# Altium PCB Copy of SoM.PcbDoc (part 4 of 8)
Units mm, origin at the board's own origin, x right, y up, seen from the top; angles counter-clockwise.
Board outline 69.6 x 50 mm, 10 copper layers ([1] Signal HS-H, [2] GND, [3] Signal HS-V, [4] Signal H, [5] GND, [6] POWER, [7] Signal V, [8] Signal HS-H, [9] GND, [10] Signal HS-V), stack 1.146 mm thick; 537 components, 516 nets, 5689 pads, 981 vias.
Unrouted connection lines stored in the file: 963.
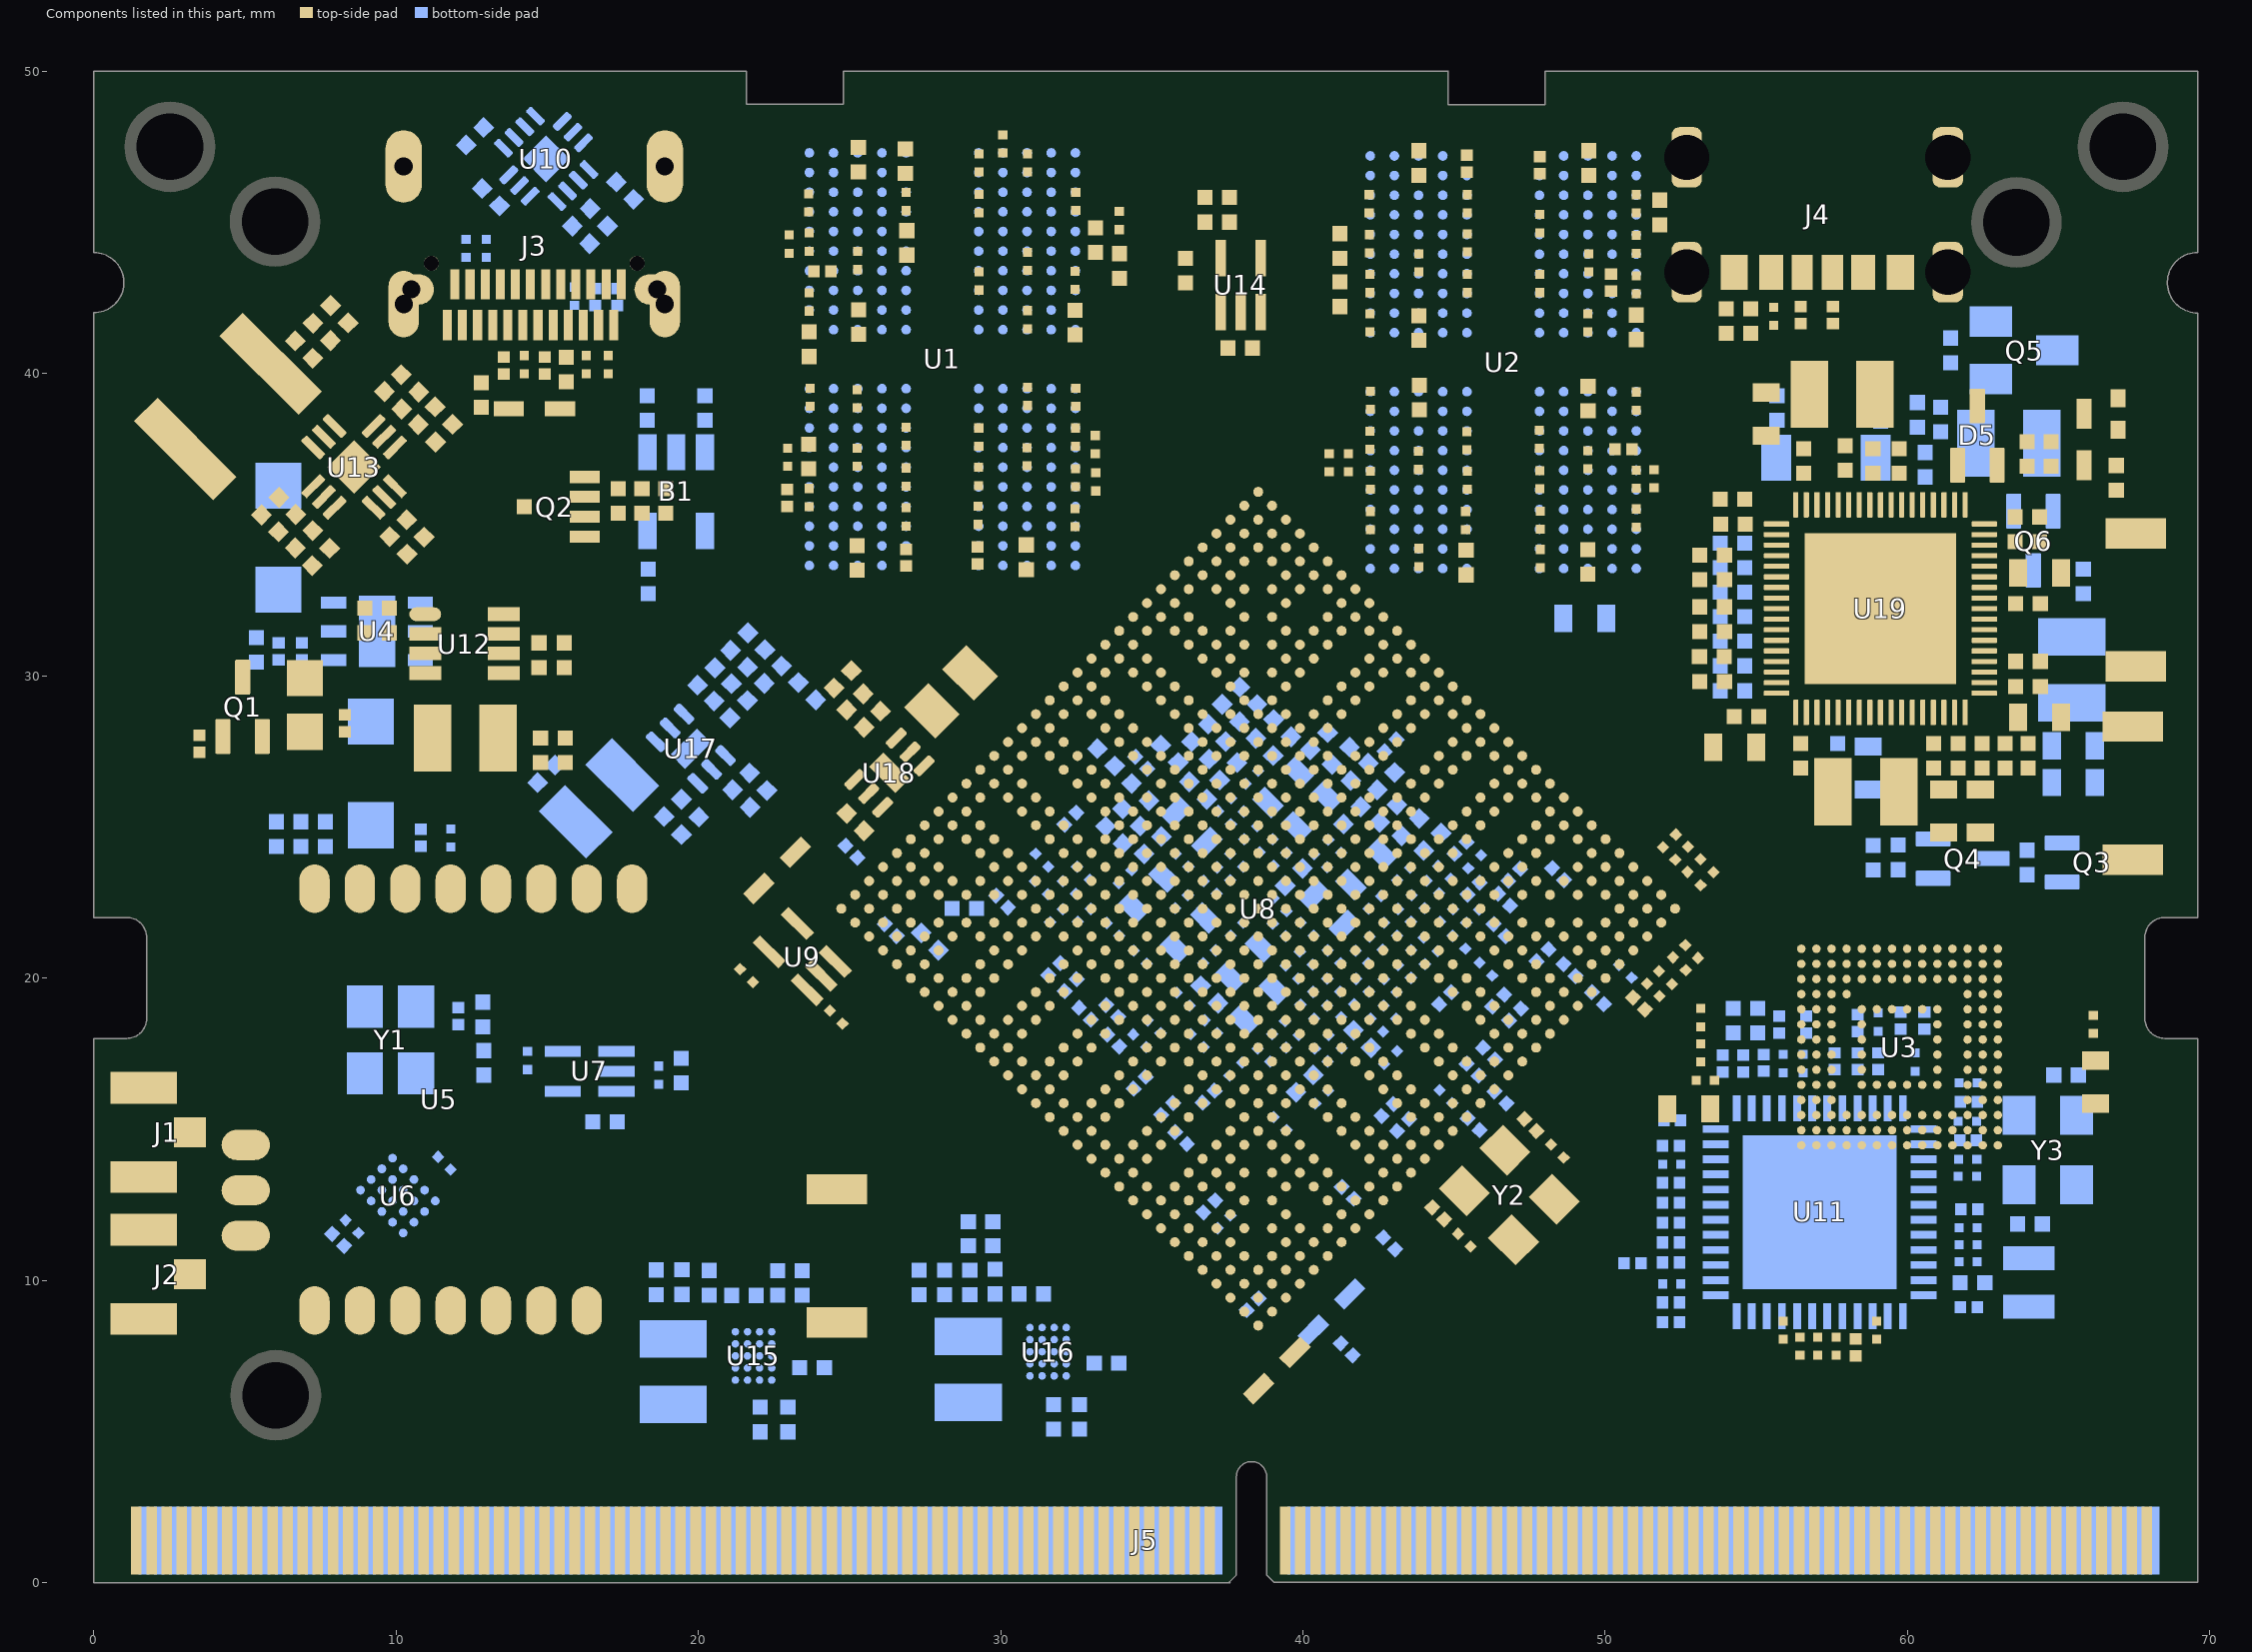
[diagram p9: the components of this part, seen from the top]

## Free pads (board coordinates)
  round 0.013 on Mech8: 1(0.001,0.004) 1(0.001,0.004) 1(0.001,0.034) 1(0.001,0.034) 1(0.001,0.604) 1(0.001,0.604) 1(0.001,42.016) 1(0.001,42.016) 1(0.001,44) 1(0.001,44) 1(0.001,49.004) 1(0.001,49.004) 1(0.001,49.014) 1(0.001,49.014) 1(0.001,49.984) 1(0.001,49.984) 1(0.001,50.004) 1(0.001,50.004) 1(0.001,49.014) 1(0.001,49.014) 1(0.008,44) 1(0.008,44) 1(0.021,50.004) 1(0.021,50.004) 1(0.031,0.004) 1(0.031,0.004) 1(0.601,0.004) 1(0.601,0.004) 1(1.001,50.004) 1(1.001,50.004) 1(21.596,50.004) 1(21.596,50.004) 1(24.799,50.004) 1(24.799,50.004) 1(37.551,0.004) 1(37.551,0.004) 1(37.801,0.254) 1(37.801,0.254) 1(37.801,3.504) 1(37.801,3.504) 1(38.301,4.004) 1(38.301,4.004) 1(38.801,0.254) 1(38.801,0.254) 1(38.801,3.504) 1(38.801,3.504) 1(39.051,0.004) 1(39.051,0.004) 1(44.799,50.004) 1(44.799,50.004) 1(44.801,50.002) 1(44.801,50.002) 1(48.004,50.004) 1(48.004,50.004) 1(67.851,18.654) 1(67.851,18.654) 1(67.851,21.354) 1(67.851,21.354) 1(68.501,18.004) 1(68.501,18.004) 1(68.501,22.004) 1(68.501,22.004) 1(69.001,0.004) 1(69.001,0.004) 1(69.589,44.002) 1(69.589,44.002) 1(69.601,0.604) 1(69.601,0.604) 1(69.601,18.004) 1(69.601,18.004) 1(69.601,22.004) 1(69.601,22.004) 1(69.601,42.006) 1(69.601,42.006) 1(69.601,44.002) 1(69.601,44.002) 1(69.601,49.004) 1(69.601,49.004) 1(69.601,50.004) 1(69.601,50.004)
  round 0.013 on Mech1: 1(0.001,18.004) 1(0.001,18.004) 1(0.001,22.004) 1(0.001,22.004) 1(0.001,45.404) 1(0.001,45.404) 1(1.101,18.004) 1(1.101,18.004) 1(1.101,22.004) 1(1.101,22.004) 1(1.751,18.654) 1(1.751,18.654) 1(1.751,21.354) 1(1.751,21.354) 1(21.596,48.902) 1(21.596,48.902) 1(24.799,48.902) 1(24.799,48.902) 1(44.801,48.894) 1(44.801,48.894) 1(48.004,48.894) 1(48.004,48.894) 1(68.601,50.004) 1(68.601,50.004) 1(69.561,0.004) 1(69.561,0.004) 1(69.601,0.004) 1(69.601,0.004) 1(69.601,0.044) 1(69.601,0.044) 1(69.601,45.404) 1(69.601,45.404)
  round 0.013 on Mech4: 1(0.486,47.504) 1(1.101,6.004) 1(1.448,9.148) 1(1.498,0.304) 1(1.498,0.304) 1(1.498,2.564) 1(1.498,2.564) 1(1.853,0.304) 1(1.853,0.304) 1(1.853,2.564) 1(1.853,2.564) 1(1.998,0.304) 1(1.998,0.304) 1(1.998,2.564) 1(1.998,2.564) 1(2.353,0.304) 1(2.353,0.304) 1(2.353,2.564) 1(2.353,2.564) 1(2.464,42.702) 1(2.498,0.304) 1(2.498,0.304) 1(2.498,2.564) 1(2.498,2.564) 1(2.718,9.148) 1(2.853,0.304) 1(2.853,0.304) 1(2.853,2.564) 1(2.853,2.564) 1(2.901,6.004) 1(2.998,0.304) 1(2.998,0.304) 1(2.998,2.564) 1(2.998,2.564) 1(3.353,0.304) 1(3.353,0.304) 1(3.353,2.564) 1(3.353,2.564) 1(3.498,0.304) 1(3.498,0.304) 1(3.498,2.564) 1(3.498,2.564) 1(3.734,42.702) 1(3.853,0.304) 1(3.853,0.304) 1(3.853,2.564) 1(3.853,2.564) 1(3.998,0.304) 1(3.998,0.304) 1(3.998,2.564) 1(3.998,2.564) 1(4,6.199) 1(4,45.005) 1(4.072,14.485) 1(4.072,14.485) 1(4.072,15.085) 1(4.072,15.085) 1(4.072,15.435) 1(4.072,15.435) 1(4.072,16.935) 1(4.072,16.935) 1(4.072,17.235) 1(4.072,17.235) 1(4.072,18.435) 1(4.072,18.435) 1(4.072,18.735) 1(4.072,18.735) 1(4.072,20.235) 1(4.072,20.235) 1(4.072,20.585) 1(4.072,20.585) 1(4.072,21.185) 1(4.072,21.185) 1(4.072,30.004) 1(4.072,30.004) 1(4.072,35.754) 1(4.072,35.754) 1(4.072,36.104) 1(4.072,36.104) 1(4.072,36.704) 1(4.072,36.704) 1(4.353,0.304) 1(4.353,0.304) 1(4.353,2.564) 1(4.353,2.564) 1(4.486,47.504) 1(4.498,0.304) 1(4.498,0.304) 1(4.498,2.564) 1(4.498,2.564) 1(4.853,0.304) 1(4.853,0.304) 1(4.853,2.564) 1(4.853,2.564) 1(4.972,14.485) 1(4.972,14.485) 1(4.972,15.085) 1(4.972,15.085) 1(4.972,15.435) 1(4.972,15.435) 1(4.972,16.935) 1(4.972,16.935) 1(4.972,17.235) 1(4.972,17.235) 1(4.972,18.435) 1(4.972,18.435) 1(4.972,18.735) 1(4.972,18.735) 1(4.972,20.235) 1(4.972,20.235) 1(4.972,20.585) 1(4.972,20.585) 1(4.972,21.185) 1(4.972,21.185) 1(4.972,30.004) 1(4.972,30.004) 1(4.972,30.604) 1(4.972,30.604) 1(4.972,35.754) 1(4.972,35.754) 1(4.972,36.104) 1(4.972,36.104) 1(4.972,36.704) 1(4.972,36.704) 1(4.998,0.304) 1(4.998,0.304) 1(4.998,2.564) 1(4.998,2.564) 1(5.353,0.304) 1(5.353,0.304) 1(5.353,2.564) 1(5.353,2.564) 1(5.498,0.304) 1(5.498,0.304) 1(5.498,2.564) 1(5.498,2.564) 1(5.502,21.875) 1(5.502,22.764) 1(5.853,0.304) 1(5.853,0.304) 1(5.853,2.564) 1(5.853,2.564) 1(5.998,0.304) 1(5.998,0.304) 1(5.998,2.564) 1(5.998,2.564) 1(6.353,0.304) 1(6.353,0.304) 1(6.353,2.564) 1(6.353,2.564) 1(6.498,0.304) 1(6.498,0.304) 1(6.498,2.564) 1(6.498,2.564) 1(6.853,0.304) 1(6.853,0.304) 1(6.853,2.564) 1(6.853,2.564) 1(6.998,0.304) 1(6.998,0.304) 1(6.998,2.564) 1(6.998,2.564) 1(7.353,0.304) 1(7.353,0.304) 1(7.353,2.564) 1(7.353,2.564) 1(7.498,0.304) 1(7.498,0.304) 1(7.498,2.564) 1(7.498,2.564) 1(7.853,0.304) 1(7.853,0.304) 1(7.853,2.564) 1(7.853,2.564) 1(7.998,0.304) 1(7.998,0.304) 1(7.998,2.564) 1(7.998,2.564) 1(8,6.199) 1(8,45.005) 1(8.353,0.304) 1(8.353,0.304) 1(8.353,2.564) 1(8.353,2.564) 1(8.498,0.304) 1(8.498,0.304) 1(8.498,2.564) 1(8.498,2.564) 1(8.853,0.304) 1(8.853,0.304) 1(8.853,2.564) 1(8.853,2.564) 1(8.998,0.304) 1(8.998,0.304) 1(8.998,2.564) 1(8.998,2.564) 1(9.353,0.304) 1(9.353,0.304) 1(9.353,2.564) 1(9.353,2.564) 1(9.498,0.304) 1(9.498,0.304) 1(9.498,2.564) 1(9.498,2.564) 1(9.643,48.627) 1(9.643,48.627) 1(9.643,49.527) 1(9.643,49.527) 1(9.853,0.304) 1(9.853,0.304) 1(9.853,2.564) 1(9.853,2.564) 1(9.998,0.304) 1(9.998,0.304) 1(9.998,2.564) 1(9.998,2.564) 1(10.243,48.627) 1(10.243,48.627) 1(10.243,49.527) 1(10.243,49.527) 1(10.353,0.304) 1(10.353,0.304) 1(10.353,2.564) 1(10.353,2.564) 1(10.498,0.304) 1(10.498,0.304) 1(10.498,2.564) 1(10.498,2.564) 1(10.593,48.627) 1(10.593,48.627) 1(10.593,49.527) 1(10.593,49.527) 1(10.853,0.304) 1(10.853,0.304) 1(10.853,2.564) 1(10.853,2.564) 1(10.998,0.304) 1(10.998,0.304) 1(10.998,2.564) 1(10.998,2.564) 1(11.353,0.304) 1(11.353,0.304) 1(11.353,2.564) 1(11.353,2.564) 1(11.498,0.304) 1(11.498,0.304) 1(11.498,2.564) 1(11.498,2.564) 1(11.853,0.304) 1(11.853,0.304) 1(11.853,2.564) 1(11.853,2.564) 1(11.998,0.304) 1(11.998,0.304) 1(11.998,2.564) 1(11.998,2.564) 1(12.093,48.627) 1(12.093,48.627) 1(12.093,49.527) 1(12.093,49.527) 1(12.353,0.304) 1(12.353,0.304) 1(12.353,2.564) 1(12.353,2.564) 1(12.393,48.627) 1(12.393,48.627) 1(12.393,49.527) 1(12.393,49.527) 1(12.498,0.304) 1(12.498,0.304) 1(12.498,2.564) 1(12.498,2.564) 1(12.853,0.304) 1(12.853,0.304) 1(12.853,2.564) 1(12.853,2.564) 1(12.998,0.304) 1(12.998,0.304) 1(12.998,2.564) 1(12.998,2.564) 1(13.353,0.304) 1(13.353,0.304) 1(13.353,2.564) 1(13.353,2.564) 1(13.498,0.304) 1(13.498,0.304) 1(13.498,2.564) 1(13.498,2.564) 1(13.593,48.627) 1(13.593,48.627) 1(13.593,49.527) 1(13.593,49.527) 1(13.853,0.304) 1(13.853,0.304) 1(13.853,2.564) 1(13.853,2.564) 1(13.893,48.627) 1(13.893,48.627) 1(13.893,49.527) 1(13.893,49.527) 1(13.998,0.304) 1(13.998,0.304) 1(13.998,2.564) 1(13.998,2.564) 1(14.353,0.304) 1(14.353,0.304) 1(14.353,2.564) 1(14.353,2.564) 1(14.498,0.304) 1(14.498,0.304) 1(14.498,2.564) 1(14.498,2.564) 1(14.853,0.304) 1(14.853,0.304) 1(14.853,2.564) 1(14.853,2.564) 1(14.998,0.304) 1(14.998,0.304) 1(14.998,2.564) 1(14.998,2.564) 1(15.353,0.304) 1(15.353,0.304) 1(15.353,2.564) 1(15.353,2.564) 1(15.393,48.627) 1(15.393,48.627) 1(15.393,49.527) 1(15.393,49.527) 1(15.498,0.304) 1(15.498,0.304) 1(15.498,2.564) 1(15.498,2.564) 1(15.743,48.627) 1(15.743,48.627) 1(15.743,49.527) 1(15.743,49.527) 1(15.853,0.304) 1(15.853,0.304) 1(15.853,2.564) 1(15.853,2.564) 1(15.998,0.304) 1(15.998,0.304) 1(15.998,2.564) 1(15.998,2.564) 1(16.343,48.627) 1(16.343,48.627) 1(16.343,49.527) 1(16.343,49.527) 1(16.353,0.304) 1(16.353,0.304) 1(16.353,2.564) 1(16.353,2.564) 1(16.498,0.304) 1(16.498,0.304) 1(16.498,2.564) 1(16.498,2.564) 1(16.853,0.304) 1(16.853,0.304) 1(16.853,2.564) 1(16.853,2.564) 1(16.998,0.304) 1(16.998,0.304) 1(16.998,2.564) 1(16.998,2.564) 1(17.353,0.304) 1(17.353,0.304) 1(17.353,2.564) 1(17.353,2.564) 1(17.498,0.304) 1(17.498,0.304) 1(17.498,2.564) 1(17.498,2.564) 1(17.853,0.304) 1(17.853,0.304) 1(17.853,2.564) 1(17.853,2.564) 1(17.998,0.304) 1(17.998,0.304) 1(17.998,2.564) 1(17.998,2.564) 1(18.353,0.304) 1(18.353,0.304) 1(18.353,2.564) 1(18.353,2.564) 1(18.498,0.304) 1(18.498,0.304) 1(18.498,2.564) 1(18.498,2.564) 1(18.853,0.304) 1(18.853,0.304) 1(18.853,2.564) 1(18.853,2.564) 1(18.998,0.304) 1(18.998,0.304) 1(18.998,2.564) 1(18.998,2.564) 1(19.353,0.304) 1(19.353,0.304) 1(19.353,2.564) 1(19.353,2.564) 1(19.498,0.304) 1(19.498,0.304) 1(19.498,2.564) 1(19.498,2.564) 1(19.853,0.304) 1(19.853,0.304) 1(19.853,2.564) 1(19.853,2.564) 1(19.998,0.304) 1(19.998,0.304) 1(19.998,2.564) 1(19.998,2.564) 1(20.353,0.304) 1(20.353,0.304) 1(20.353,2.564) 1(20.353,2.564) 1(20.498,0.304) 1(20.498,0.304) 1(20.498,2.564) 1(20.498,2.564) 1(20.853,0.304) 1(20.853,0.304) 1(20.853,2.564) 1(20.853,2.564) 1(20.998,0.304) 1(20.998,0.304) 1(20.998,2.564) 1(20.998,2.564) 1(21.353,0.304) 1(21.353,0.304) 1(21.353,2.564) 1(21.353,2.564) 1(21.498,0.304) 1(21.498,0.304) 1(21.498,2.564) 1(21.498,2.564) 1(21.853,0.304) 1(21.853,0.304) 1(21.853,2.564) 1(21.853,2.564) 1(21.998,0.304) 1(21.998,0.304) 1(21.998,2.564) 1(21.998,2.564) 1(22.353,0.304) 1(22.353,0.304) 1(22.353,2.564) 1(22.353,2.564) 1(22.498,0.304) 1(22.498,0.304) 1(22.498,2.564) 1(22.498,2.564) 1(22.853,0.304) 1(22.853,0.304) 1(22.853,2.564) 1(22.853,2.564) 1(22.998,0.304) 1(22.998,0.304) 1(22.998,2.564) 1(22.998,2.564) 1(23.353,0.304) 1(23.353,0.304) 1(23.353,2.564) 1(23.353,2.564) 1(23.498,0.304) 1(23.498,0.304) 1(23.498,2.564) 1(23.498,2.564) 1(23.853,0.304) 1(23.853,0.304) 1(23.853,2.564) 1(23.853,2.564) 1(23.998,0.304) 1(23.998,0.304) 1(23.998,2.564) 1(23.998,2.564) 1(24.353,0.304) 1(24.353,0.304) 1(24.353,2.564) 1(24.353,2.564) 1(24.498,0.304) 1(24.498,0.304) 1(24.498,2.564) 1(24.498,2.564) 1(24.853,0.304) 1(24.853,0.304) 1(24.853,2.564) 1(24.853,2.564) 1(24.998,0.304) 1(24.998,0.304) 1(24.998,2.564) 1(24.998,2.564) 1(25.353,0.304) 1(25.353,0.304) 1(25.353,2.564) 1(25.353,2.564) 1(25.498,0.304) 1(25.498,0.304) 1(25.498,2.564) 1(25.498,2.564) 1(25.853,0.304) 1(25.853,0.304) 1(25.853,2.564) 1(25.853,2.564) 1(25.998,0.304) 1(25.998,0.304) 1(25.998,2.564) 1(25.998,2.564) 1(26.353,0.304) 1(26.353,0.304) 1(26.353,2.564) 1(26.353,2.564) 1(26.498,0.304) 1(26.498,0.304) 1(26.498,2.564) 1(26.498,2.564) 1(26.853,0.304) 1(26.853,0.304) 1(26.853,2.564) 1(26.853,2.564) 1(26.998,0.304) 1(26.998,0.304) 1(26.998,2.564) 1(26.998,2.564) 1(27.353,0.304) 1(27.353,0.304) 1(27.353,2.564) 1(27.353,2.564) 1(27.498,0.304) 1(27.498,0.304) 1(27.498,2.564) 1(27.498,2.564) 1(27.853,0.304) 1(27.853,0.304) 1(27.853,2.564) 1(27.853,2.564) 1(27.998,0.304) 1(27.998,0.304) 1(27.998,2.564) 1(27.998,2.564) 1(28.353,0.304) 1(28.353,0.304) 1(28.353,2.564) 1(28.353,2.564) 1(28.498,0.304) 1(28.498,0.304) 1(28.498,2.564) 1(28.498,2.564) 1(28.853,0.304) 1(28.853,0.304) 1(28.853,2.564) 1(28.853,2.564) 1(28.998,0.304) 1(28.998,0.304) 1(28.998,2.564) 1(28.998,2.564) 1(29.353,0.304) 1(29.353,0.304) 1(29.353,2.564) 1(29.353,2.564) 1(29.498,0.304) 1(29.498,0.304) 1(29.498,2.564) 1(29.498,2.564) 1(29.853,0.304) 1(29.853,0.304) 1(29.853,2.564) 1(29.853,2.564) 1(29.998,0.304) 1(29.998,0.304) 1(29.998,2.564) 1(29.998,2.564) 1(30.353,0.304) 1(30.353,0.304) 1(30.353,2.564) 1(30.353,2.564) 1(30.498,0.304) 1(30.498,0.304) 1(30.498,2.564) 1(30.498,2.564) 1(30.853,0.304) 1(30.853,0.304) 1(30.853,2.564) 1(30.853,2.564) 1(30.998,0.304) 1(30.998,0.304) 1(30.998,2.564) 1(30.998,2.564) 1(31.353,0.304) 1(31.353,0.304) 1(31.353,2.564) 1(31.353,2.564) 1(31.436,48.627) 1(31.436,48.627) 1(31.436,49.527) 1(31.436,49.527) 1(31.498,0.304) 1(31.498,0.304) 1(31.498,2.564) 1(31.498,2.564) 1(31.853,0.304) 1(31.853,0.304) 1(31.853,2.564) 1(31.853,2.564) 1(31.998,0.304) 1(31.998,0.304) 1(31.998,2.564) 1(31.998,2.564) 1(32.036,48.627) 1(32.036,48.627) 1(32.036,49.527) 1(32.036,49.527) 1(32.353,0.304) 1(32.353,0.304) 1(32.353,2.564) 1(32.353,2.564) 1(32.386,48.627) 1(32.386,48.627) 1(32.386,49.527) 1(32.386,49.527) 1(32.498,0.304) 1(32.498,0.304) 1(32.498,2.564) 1(32.498,2.564) 1(32.853,0.304) 1(32.853,0.304) 1(32.853,2.564) 1(32.853,2.564) 1(32.998,0.304) 1(32.998,0.304) 1(32.998,2.564) 1(32.998,2.564) 1(33.353,0.304) 1(33.353,0.304) 1(33.353,2.564) 1(33.353,2.564) 1(33.498,0.304) 1(33.498,0.304) 1(33.498,2.564) 1(33.498,2.564) 1(33.853,0.304) 1(33.853,0.304) 1(33.853,2.564) 1(33.853,2.564) 1(33.886,48.627) 1(33.886,48.627) 1(33.886,49.527) 1(33.886,49.527) 1(33.998,0.304) 1(33.998,0.304) 1(33.998,2.564) 1(33.998,2.564) 1(34.186,48.627) 1(34.186,48.627) 1(34.186,49.527) 1(34.186,49.527) 1(34.353,0.304) 1(34.353,0.304) 1(34.353,2.564) 1(34.353,2.564) 1(34.498,0.304) 1(34.498,0.304) 1(34.498,2.564) 1(34.498,2.564) 1(34.853,0.304) 1(34.853,0.304) 1(34.853,2.564) 1(34.853,2.564) 1(34.998,0.304) 1(34.998,0.304) 1(34.998,2.564) 1(34.998,2.564) 1(35.353,0.304) 1(35.353,0.304) 1(35.353,2.564) 1(35.353,2.564) 1(35.386,48.627) 1(35.386,48.627) 1(35.386,49.527) 1(35.386,49.527) 1(35.498,0.304) 1(35.498,0.304) 1(35.498,2.564) 1(35.498,2.564) 1(35.686,48.627) 1(35.686,48.627) 1(35.686,49.527) 1(35.686,49.527) 1(35.853,0.304) 1(35.853,0.304) 1(35.853,2.564) 1(35.853,2.564) 1(35.998,0.304) 1(35.998,0.304) 1(35.998,2.564) 1(35.998,2.564) 1(36.353,0.304) 1(36.353,0.304) 1(36.353,2.564) 1(36.353,2.564) 1(36.498,0.304) 1(36.498,0.304) 1(36.498,2.564) 1(36.498,2.564) 1(36.853,0.304) 1(36.853,0.304) 1(36.853,2.564) 1(36.853,2.564) 1(36.998,0.304) 1(36.998,0.304) 1(36.998,2.564) 1(36.998,2.564) 1(37.186,48.627) 1(37.186,48.627) 1(37.186,49.527) 1(37.186,49.527) 1(37.353,0.304) 1(37.353,0.304) 1(37.353,2.564) 1(37.353,2.564) 1(37.536,48.627) 1(37.536,48.627) 1(37.536,49.527) 1(37.536,49.527) 1(38.136,48.627) 1(38.136,48.627) 1(38.136,49.527) 1(38.136,49.527) 1(39.498,0.304) 1(39.498,0.304) 1(39.498,2.564) 1(39.498,2.564) 1(39.853,0.304) 1(39.853,0.304) 1(39.853,2.564) 1(39.853,2.564) 1(39.998,0.304) 1(39.998,0.304) 1(39.998,2.564) 1(39.998,2.564) 1(40.353,0.304) 1(40.353,0.304) 1(40.353,2.564) 1(40.353,2.564) 1(40.498,0.304) 1(40.498,0.304) 1(40.498,2.564) 1(40.498,2.564) 1(40.853,0.304) 1(40.853,0.304) 1(40.853,2.564) 1(40.853,2.564) 1(40.998,0.304) 1(40.998,0.304) 1(40.998,2.564) 1(40.998,2.564) 1(41.353,0.304) 1(41.353,0.304) 1(41.353,2.564) 1(41.353,2.564) 1(41.498,0.304) 1(41.498,0.304) 1(41.498,2.564) 1(41.498,2.564) 1(41.853,0.304) 1(41.853,0.304) 1(41.853,2.564) 1(41.853,2.564) 1(41.998,0.304) 1(41.998,0.304) 1(41.998,2.564) 1(41.998,2.564) 1(42.353,0.304) 1(42.353,0.304) 1(42.353,2.564) 1(42.353,2.564) 1(42.498,0.304) 1(42.498,0.304) 1(42.498,2.564) 1(42.498,2.564) 1(42.853,0.304) 1(42.853,0.304) 1(42.853,2.564) 1(42.853,2.564) 1(42.998,0.304) 1(42.998,0.304) 1(42.998,2.564) 1(42.998,2.564) 1(43.353,0.304) 1(43.353,0.304) 1(43.353,2.564) 1(43.353,2.564) 1(43.498,0.304) 1(43.498,0.304) 1(43.498,2.564) 1(43.498,2.564) 1(43.853,0.304) 1(43.853,0.304) 1(43.853,2.564) 1(43.853,2.564) 1(43.998,0.304) 1(43.998,0.304) 1(43.998,2.564) 1(43.998,2.564) 1(44.353,0.304) 1(44.353,0.304) 1(44.353,2.564) 1(44.353,2.564) 1(44.498,0.304) 1(44.498,0.304) 1(44.498,2.564) 1(44.498,2.564) 1(44.853,0.304) 1(44.853,0.304) 1(44.853,2.564) 1(44.853,2.564) 1(44.998,0.304) 1(44.998,0.304) 1(44.998,2.564) 1(44.998,2.564) 1(45.353,0.304) 1(45.353,0.304) 1(45.353,2.564) 1(45.353,2.564) 1(45.498,0.304) 1(45.498,0.304) 1(45.498,2.564) 1(45.498,2.564) 1(45.853,0.304) 1(45.853,0.304) 1(45.853,2.564) 1(45.853,2.564) 1(45.998,0.304) 1(45.998,0.304) 1(45.998,2.564) 1(45.998,2.564) 1(46.353,0.304) 1(46.353,0.304) 1(46.353,2.564) 1(46.353,2.564) 1(46.498,0.304) 1(46.498,0.304) 1(46.498,2.564) 1(46.498,2.564) 1(46.853,0.304) 1(46.853,0.304) 1(46.853,2.564) 1(46.853,2.564) 1(46.998,0.304) 1(46.998,0.304) 1(46.998,2.564) 1(46.998,2.564) 1(47.353,0.304) 1(47.353,0.304) 1(47.353,2.564) 1(47.353,2.564) 1(47.498,0.304) 1(47.498,0.304) 1(47.498,2.564) 1(47.498,2.564) 1(47.853,0.304) 1(47.853,0.304) 1(47.853,2.564) 1(47.853,2.564) 1(47.998,0.304) 1(47.998,0.304) 1(47.998,2.564) 1(47.998,2.564) 1(48.353,0.304) 1(48.353,0.304) 1(48.353,2.564) 1(48.353,2.564) 1(48.498,0.304) 1(48.498,0.304) 1(48.498,2.564) 1(48.498,2.564) 1(48.853,0.304) 1(48.853,0.304) 1(48.853,2.564) 1(48.853,2.564) 1(48.998,0.304) 1(48.998,0.304) 1(48.998,2.564) 1(48.998,2.564) 1(49.353,0.304) 1(49.353,0.304) 1(49.353,2.564) 1(49.353,2.564) 1(49.498,0.304) 1(49.498,0.304) 1(49.498,2.564) 1(49.498,2.564) 1(49.853,0.304) 1(49.853,0.304) 1(49.853,2.564) 1(49.853,2.564) 1(49.998,0.304) 1(49.998,0.304) 1(49.998,2.564) 1(49.998,2.564) 1(50.353,0.304) 1(50.353,0.304) 1(50.353,2.564) 1(50.353,2.564) 1(50.498,0.304) 1(50.498,0.304) 1(50.498,2.564) 1(50.498,2.564) 1(50.853,0.304) 1(50.853,0.304) 1(50.853,2.564) 1(50.853,2.564) 1(50.998,0.304) 1(50.998,0.304) 1(50.998,2.564) 1(50.998,2.564) 1(51.353,0.304) 1(51.353,0.304) 1(51.353,2.564) 1(51.353,2.564) 1(51.498,0.304) 1(51.498,0.304) 1(51.498,2.564) 1(51.498,2.564) 1(51.853,0.304) 1(51.853,0.304) 1(51.853,2.564) 1(51.853,2.564) 1(51.998,0.304) 1(51.998,0.304) 1(51.998,2.564) 1(51.998,2.564) 1(52.353,0.304) 1(52.353,0.304) 1(52.353,2.564) 1(52.353,2.564) 1(52.498,0.304) 1(52.498,0.304) 1(52.498,2.564) 1(52.498,2.564) 1(52.853,0.304) 1(52.853,0.304) 1(52.853,2.564) 1(52.853,2.564) 1(52.998,0.304) 1(52.998,0.304) 1(52.998,2.564) 1(52.998,2.564) 1(53.242,48.627) 1(53.242,48.627) 1(53.242,49.527) 1(53.242,49.527) 1(53.353,0.304) 1(53.353,0.304) 1(53.353,2.564) 1(53.353,2.564) 1(53.498,0.304) 1(53.498,0.304) 1(53.498,2.564) 1(53.498,2.564) 1(53.842,48.627) 1(53.842,48.627) 1(53.842,49.527) 1(53.842,49.527) 1(53.853,0.304) 1(53.853,0.304) 1(53.853,2.564) 1(53.853,2.564) 1(53.998,0.304) 1(53.998,0.304) 1(53.998,2.564) 1(53.998,2.564) 1(54.192,48.627) 1(54.192,48.627) 1(54.192,49.527) 1(54.192,49.527) 1(54.353,0.304) 1(54.353,0.304) 1(54.353,2.564) 1(54.353,2.564) 1(54.498,0.304) 1(54.498,0.304) 1(54.498,2.564) 1(54.498,2.564) 1(54.853,0.304) 1(54.853,0.304) 1(54.853,2.564) 1(54.853,2.564) 1(54.998,0.304) 1(54.998,0.304) 1(54.998,2.564) 1(54.998,2.564) 1(55.353,0.304) 1(55.353,0.304) 1(55.353,2.564) 1(55.353,2.564) 1(55.496,48.194) 1(55.498,0.304) 1(55.498,0.304) 1(55.498,2.564) 1(55.498,2.564) 1(55.692,48.627) 1(55.692,48.627) 1(55.692,49.527) 1(55.692,49.527) 1(55.75,48.194) 1(55.853,0.304) 1(55.853,0.304) 1(55.853,2.564) 1(55.853,2.564) 1(55.992,48.627) 1(55.992,48.627) 1(55.992,49.527) 1(55.992,49.527) 1(55.998,0.304) 1(55.998,0.304) 1(55.998,2.564) 1(55.998,2.564) 1(56.146,48.194) 1(56.353,0.304) 1(56.353,0.304) 1(56.353,2.564) 1(56.353,2.564) 1(56.4,48.194) 1(56.498,0.304) 1(56.498,0.304) 1(56.498,2.564) 1(56.498,2.564) 1(56.796,48.194) 1(56.853,0.304) 1(56.853,0.304) 1(56.853,2.564) 1(56.853,2.564) 1(56.998,0.304) 1(56.998,0.304) 1(56.998,2.564) 1(56.998,2.564) 1(57.05,48.194) 1(57.192,48.627) 1(57.192,48.627) 1(57.192,49.527) 1(57.192,49.527) 1(57.353,0.304) 1(57.353,0.304) 1(57.353,2.564) 1(57.353,2.564) 1(57.492,48.627) 1(57.492,48.627) 1(57.492,49.527) 1(57.492,49.527) 1(57.498,0.304) 1(57.498,0.304) 1(57.498,2.564) 1(57.498,2.564) 1(57.853,0.304) 1(57.853,0.304) 1(57.853,2.564) 1(57.853,2.564) 1(57.998,0.304) 1(57.998,0.304) 1(57.998,2.564) 1(57.998,2.564) 1(58.128,48.074) 1(58.353,0.304) 1(58.353,0.304) 1(58.353,2.564) 1(58.353,2.564) 1(58.498,0.304) 1(58.498,0.304) 1(58.498,2.564) 1(58.498,2.564) 1(58.853,0.304) 1(58.853,0.304) 1(58.853,2.564) 1(58.853,2.564) 1(58.916,48.074) 1(58.992,48.627) 1(58.992,48.627) 1(58.992,49.527) 1(58.992,49.527) 1(58.998,0.304) 1(58.998,0.304) 1(58.998,2.564) 1(58.998,2.564) 1(59.342,48.627) 1(59.342,48.627) 1(59.342,49.527) 1(59.342,49.527) 1(59.353,0.304) 1(59.353,0.304) 1(59.353,2.564) 1(59.353,2.564) 1(59.498,0.304) 1(59.498,0.304) 1(59.498,2.564) 1(59.498,2.564) 1(59.853,0.304) 1(59.853,0.304) 1(59.853,2.564) 1(59.853,2.564) 1(59.942,48.627) 1(59.942,48.627) 1(59.942,49.527) 1(59.942,49.527) 1(59.998,0.304) 1(59.998,0.304) 1(59.998,2.564) 1(59.998,2.564) 1(60.353,0.304) 1(60.353,0.304) 1(60.353,2.564) 1(60.353,2.564) 1(60.498,0.304) 1(60.498,0.304) 1(60.498,2.564) 1(60.498,2.564) 1(60.853,0.304) 1(60.853,0.304) 1(60.853,2.564) 1(60.853,2.564) 1(60.998,0.304) 1(60.998,0.304) 1(60.998,2.564) 1(60.998,2.564) 1(61.353,0.304) 1(61.353,0.304) 1(61.353,2.564) 1(61.353,2.564) 1(61.498,0.304) 1(61.498,0.304) 1(61.498,2.564) 1(61.498,2.564) 1(61.6,44.995) 1(61.853,0.304) 1(61.853,0.304) 1(61.853,2.564) 1(61.853,2.564) 1(61.998,0.304) 1(61.998,0.304) 1(61.998,2.564) 1(61.998,2.564) 1(62.353,0.304) 1(62.353,0.304) 1(62.353,2.564) 1(62.353,2.564) 1(62.498,0.304) 1(62.498,0.304) 1(62.498,2.564) 1(62.498,2.564) 1(62.853,0.304) 1(62.853,0.304) 1(62.853,2.564) 1(62.853,2.564) 1(62.998,0.304) 1(62.998,0.304) 1(62.998,2.564) 1(62.998,2.564) 1(63.353,0.304) 1(63.353,0.304) 1(63.353,2.564) 1(63.353,2.564) 1(63.498,0.304) 1(63.498,0.304) 1(63.498,2.564) 1(63.498,2.564) 1(63.853,0.304) 1(63.853,0.304) 1(63.853,2.564) 1(63.853,2.564) 1(63.998,0.304) 1(63.998,0.304) 1(63.998,2.564) 1(63.998,2.564) 1(64.353,0.304) 1(64.353,0.304) 1(64.353,2.564) 1(64.353,2.564) 1(64.498,0.304) 1(64.498,0.304) 1(64.498,2.564) 1(64.498,2.564) 1(64.625,30.004) 1(64.625,30.004) 1(64.625,30.604) 1(64.625,30.604) 1(64.625,30.954) 1(64.625,30.954) 1(64.625,32.454) 1(64.625,32.454) 1(64.625,32.754) 1(64.625,32.754) 1(64.625,33.954) 1(64.625,33.954) 1(64.625,34.254) 1(64.625,34.254) 1(64.625,35.754) 1(64.625,35.754) 1(64.625,36.104) 1(64.625,36.104) 1(64.625,36.704) 1(64.625,36.704) 1(64.651,14.485) 1(64.651,14.485) 1(64.651,15.085) 1(64.651,15.085) 1(64.651,20.585) 1(64.651,20.585) 1(64.651,21.185) 1(64.651,21.185) 1(64.651,15.435) 1(64.651,15.435) 1(64.651,16.935) 1(64.651,16.935) 1(64.651,17.235) 1(64.651,17.235) 1(64.651,18.435) 1(64.651,18.435) 1(64.651,18.735) 1(64.651,18.735) 1(64.651,20.235) 1(64.651,20.235) 1(64.853,0.304) 1(64.853,0.304) 1(64.853,2.564) 1(64.853,2.564) 1(64.998,0.304) 1(64.998,0.304) 1(64.998,2.564) 1(64.998,2.564) 1(65.101,47.504) 1(65.353,0.304) 1(65.353,0.304) 1(65.353,2.564) 1(65.353,2.564) 1(65.498,0.304) 1(65.498,0.304) 1(65.498,2.564) 1(65.498,2.564) 1(65.525,30.004) 1(65.525,30.004) 1(65.525,30.604) 1(65.525,30.604) 1(65.525,30.954) 1(65.525,30.954) 1(65.525,32.454) 1(65.525,32.454) 1(65.525,32.754) 1(65.525,32.754) 1(65.525,33.954) 1(65.525,33.954) 1(65.525,34.254) 1(65.525,34.254) 1(65.525,35.754) 1(65.525,35.754) 1(65.525,36.104) 1(65.525,36.104) 1(65.525,36.704) 1(65.525,36.704) 1(65.551,14.485) 1(65.551,14.485) 1(65.551,15.085) 1(65.551,15.085) 1(65.551,20.585) 1(65.551,20.585) 1(65.551,21.185) 1(65.551,21.185) 1(65.551,15.435) 1(65.551,15.435) 1(65.551,16.935) 1(65.551,16.935) 1(65.551,17.235) 1(65.551,17.235) 1(65.551,18.435) 1(65.551,18.435) 1(65.551,18.735) 1(65.551,18.735) 1(65.551,20.235) 1(65.551,20.235) 1(65.6,44.995) 1(65.853,0.304) 1(65.853,0.304) 1(65.853,2.564) 1(65.853,2.564) 1(65.998,0.304) 1(65.998,0.304) 1(65.998,2.564) 1(65.998,2.564) 1(66.218,44.022) 1(66.353,0.304) 1(66.353,0.304) 1(66.353,2.564) 1(66.353,2.564) 1(66.498,0.304) 1(66.498,0.304) 1(66.498,2.564) 1(66.498,2.564) 1(66.65,10.596) 1(66.701,6.004) 1(66.853,0.304) 1(66.853,0.304) 1(66.853,2.564) 1(66.853,2.564) 1(66.998,0.304) 1(66.998,0.304) 1(66.998,2.564) 1(66.998,2.564) 1(67.353,0.304) 1(67.353,0.304) 1(67.353,2.564) 1(67.353,2.564) 1(67.488,44.022) 1(67.498,0.304) 1(67.498,0.304) 1(67.498,2.564) 1(67.498,2.564) 1(67.853,0.304) 1(67.853,0.304) 1(67.853,2.564) 1(67.853,2.564) 1(67.92,10.596) 1(67.998,0.304) 1(67.998,0.304) 1(67.998,2.564) 1(67.998,2.564) 1(68.353,0.304) 1(68.353,0.304) 1(68.353,2.564) 1(68.353,2.564) 1(68.501,6.004) 1(69.101,47.504)
  round 0.013 on Mech5: 1(0.486,47.504) 1(1.093,9.402) 1(1.101,6.004) 1(1.248,0.304) 1(1.248,0.304) 1(1.248,2.564) 1(1.248,2.564) 1(1.603,0.304) 1(1.603,0.304) 1(1.603,2.564) 1(1.603,2.564) 1(1.748,0.304) 1(1.748,0.304) 1(1.748,2.564) 1(1.748,2.564) 1(2.103,0.304) 1(2.103,0.304) 1(2.103,2.564) 1(2.103,2.564) 1(2.21,43.895) 1(2.248,0.304) 1(2.248,0.304) 1(2.248,2.564) 1(2.248,2.564) 1(2.363,9.402) 1(2.603,0.304) 1(2.603,0.304) 1(2.603,2.564) 1(2.603,2.564) 1(2.748,0.304) 1(2.748,0.304) 1(2.748,2.564) 1(2.748,2.564) 1(2.901,6.004) 1(3.103,0.304) 1(3.103,0.304) 1(3.103,2.564) 1(3.103,2.564) 1(3.248,0.304) 1(3.248,0.304) 1(3.248,2.564) 1(3.248,2.564) 1(3.48,43.895) 1(3.603,0.304) 1(3.603,0.304) 1(3.603,2.564) 1(3.603,2.564) 1(3.748,0.304) 1(3.748,0.304) 1(3.748,2.564) 1(3.748,2.564) 1(4,6.199) 1(4,45.005) 1(4.103,0.304) 1(4.103,0.304) 1(4.103,2.564) 1(4.103,2.564) 1(4.248,0.304) 1(4.248,0.304) 1(4.248,2.564) 1(4.248,2.564) 1(4.486,47.504) 1(4.603,0.304) 1(4.603,0.304) 1(4.603,2.564) 1(4.603,2.564) 1(4.748,0.304) 1(4.748,0.304) 1(4.748,2.564) 1(4.748,2.564) 1(5.103,0.304) 1(5.103,0.304) 1(5.103,2.564) 1(5.103,2.564) 1(5.248,0.304) 1(5.248,0.304) 1(5.248,2.564) 1(5.248,2.564) 1(5.603,0.304) 1(5.603,0.304) 1(5.603,2.564) 1(5.603,2.564) 1(5.647,13.874) 1(5.647,14.074) 1(5.748,0.304) 1(5.748,0.304) 1(5.748,2.564) 1(5.748,2.564) 1(6.103,0.304) 1(6.103,0.304) 1(6.103,2.564) 1(6.103,2.564) 1(6.248,0.304) 1(6.248,0.304) 1(6.248,2.564) 1(6.248,2.564) 1(6.603,0.304) 1(6.603,0.304) 1(6.603,2.564) 1(6.603,2.564) 1(6.748,0.304) 1(6.748,0.304) 1(6.748,2.564) 1(6.748,2.564) 1(7.103,0.304) 1(7.103,0.304) 1(7.103,2.564) 1(7.103,2.564) 1(7.248,0.304) 1(7.248,0.304) 1(7.248,2.564) 1(7.248,2.564) 1(7.603,0.304) 1(7.603,0.304) 1(7.603,2.564) 1(7.603,2.564) 1(7.748,0.304) 1(7.748,0.304) 1(7.748,2.564) 1(7.748,2.564) 1(8,6.199) 1(8,45.005) 1(8.103,0.304) 1(8.103,0.304) 1(8.103,2.564) 1(8.103,2.564) 1(8.248,0.304) 1(8.248,0.304) 1(8.248,2.564) 1(8.248,2.564) 1(8.603,0.304) 1(8.603,0.304) 1(8.603,2.564) 1(8.603,2.564) 1(8.748,0.304) 1(8.748,0.304) 1(8.748,2.564) 1(8.748,2.564) 1(9.103,0.304) 1(9.103,0.304) 1(9.103,2.564) 1(9.103,2.564) 1(9.248,0.304) 1(9.248,0.304) 1(9.248,2.564) 1(9.248,2.564) 1(9.603,0.304) 1(9.603,0.304) 1(9.603,2.564) 1(9.603,2.564) 1(9.748,0.304) 1(9.748,0.304) 1(9.748,2.564) 1(9.748,2.564) 1(10.103,0.304) 1(10.103,0.304) 1(10.103,2.564) 1(10.103,2.564) 1(10.248,0.304) 1(10.248,0.304) 1(10.248,2.564) 1(10.248,2.564) 1(10.603,0.304) 1(10.603,0.304) 1(10.603,2.564) 1(10.603,2.564) 1(10.748,0.304) 1(10.748,0.304) 1(10.748,2.564) 1(10.748,2.564) 1(11.103,0.304) 1(11.103,0.304) 1(11.103,2.564) 1(11.103,2.564) 1(11.248,0.304) 1(11.248,0.304) 1(11.248,2.564) 1(11.248,2.564) 1(11.603,0.304) 1(11.603,0.304) 1(11.603,2.564) 1(11.603,2.564) 1(11.748,0.304) 1(11.748,0.304) 1(11.748,2.564) 1(11.748,2.564) 1(12.103,0.304) 1(12.103,0.304) 1(12.103,2.564) 1(12.103,2.564) 1(12.248,0.304) 1(12.248,0.304) 1(12.248,2.564) 1(12.248,2.564) 1(12.603,0.304) 1(12.603,0.304) 1(12.603,2.564) 1(12.603,2.564) 1(12.748,0.304) 1(12.748,0.304) 1(12.748,2.564) 1(12.748,2.564) 1(13.103,0.304) 1(13.103,0.304) 1(13.103,2.564) 1(13.103,2.564) 1(13.248,0.304) 1(13.248,0.304) 1(13.248,2.564) 1(13.248,2.564) 1(13.603,0.304) 1(13.603,0.304) 1(13.603,2.564) 1(13.603,2.564) 1(13.748,0.304) 1(13.748,0.304) 1(13.748,2.564) 1(13.748,2.564) 1(14.103,0.304) 1(14.103,0.304) 1(14.103,2.564) 1(14.103,2.564) 1(14.248,0.304) 1(14.248,0.304) 1(14.248,2.564) 1(14.248,2.564) 1(14.603,0.304) 1(14.603,0.304) 1(14.603,2.564) 1(14.603,2.564) 1(14.748,0.304) 1(14.748,0.304) 1(14.748,2.564) 1(14.748,2.564) 1(15.103,0.304) 1(15.103,0.304) 1(15.103,2.564) 1(15.103,2.564) 1(15.248,0.304) 1(15.248,0.304) 1(15.248,2.564) 1(15.248,2.564) 1(15.603,0.304) 1(15.603,0.304) 1(15.603,2.564) 1(15.603,2.564) 1(15.748,0.304) 1(15.748,0.304) 1(15.748,2.564) 1(15.748,2.564) 1(16.103,0.304) 1(16.103,0.304) 1(16.103,2.564) 1(16.103,2.564) 1(16.248,0.304) 1(16.248,0.304) 1(16.248,2.564) 1(16.248,2.564) 1(16.603,0.304) 1(16.603,0.304) 1(16.603,2.564) 1(16.603,2.564) 1(16.748,0.304) 1(16.748,0.304) 1(16.748,2.564) 1(16.748,2.564) 1(17.103,0.304) 1(17.103,0.304) 1(17.103,2.564) 1(17.103,2.564) 1(17.248,0.304) 1(17.248,0.304) 1(17.248,2.564) 1(17.248,2.564) 1(17.603,0.304) 1(17.603,0.304) 1(17.603,2.564) 1(17.603,2.564) 1(17.748,0.304) 1(17.748,0.304) 1(17.748,2.564) 1(17.748,2.564) 1(18.103,0.304) 1(18.103,0.304) 1(18.103,2.564) 1(18.103,2.564) 1(18.248,0.304) 1(18.248,0.304) 1(18.248,2.564) 1(18.248,2.564) 1(18.603,0.304) 1(18.603,0.304) 1(18.603,2.564) 1(18.603,2.564) 1(18.748,0.304) 1(18.748,0.304) 1(18.748,2.564) 1(18.748,2.564) 1(19.103,0.304) 1(19.103,0.304) 1(19.103,2.564) 1(19.103,2.564) 1(19.248,0.304) 1(19.248,0.304) 1(19.248,2.564) 1(19.248,2.564) 1(19.603,0.304) 1(19.603,0.304) 1(19.603,2.564) 1(19.603,2.564) 1(19.748,0.304) 1(19.748,0.304) 1(19.748,2.564) 1(19.748,2.564) 1(20.103,0.304) 1(20.103,0.304) 1(20.103,2.564) 1(20.103,2.564) 1(20.248,0.304) 1(20.248,0.304) 1(20.248,2.564) 1(20.248,2.564) 1(20.603,0.304) 1(20.603,0.304) 1(20.603,2.564) 1(20.603,2.564) 1(20.748,0.304) 1(20.748,0.304) 1(20.748,2.564) 1(20.748,2.564) 1(21.103,0.304) 1(21.103,0.304) 1(21.103,2.564) 1(21.103,2.564) 1(21.248,0.304) 1(21.248,0.304) 1(21.248,2.564) 1(21.248,2.564) 1(21.603,0.304) 1(21.603,0.304) 1(21.603,2.564) 1(21.603,2.564) 1(21.748,0.304) 1(21.748,0.304) 1(21.748,2.564) 1(21.748,2.564) 1(22.103,0.304) 1(22.103,0.304) 1(22.103,2.564) 1(22.103,2.564) 1(22.248,0.304) 1(22.248,0.304) 1(22.248,2.564) 1(22.248,2.564) 1(22.603,0.304) 1(22.603,0.304) 1(22.603,2.564) 1(22.603,2.564) 1(22.748,0.304) 1(22.748,0.304) 1(22.748,2.564) 1(22.748,2.564) 1(23.103,0.304) 1(23.103,0.304) 1(23.103,2.564) 1(23.103,2.564) 1(23.248,0.304) 1(23.248,0.304) 1(23.248,2.564) 1(23.248,2.564) 1(23.603,0.304) 1(23.603,0.304) 1(23.603,2.564) 1(23.603,2.564) 1(23.748,0.304) 1(23.748,0.304) 1(23.748,2.564) 1(23.748,2.564) 1(24.103,0.304) 1(24.103,0.304) 1(24.103,2.564) 1(24.103,2.564) 1(24.248,0.304) 1(24.248,0.304) 1(24.248,2.564) 1(24.248,2.564) 1(24.603,0.304) 1(24.603,0.304) 1(24.603,2.564) 1(24.603,2.564) 1(24.748,0.304) 1(24.748,0.304) 1(24.748,2.564) 1(24.748,2.564) 1(25.103,0.304) 1(25.103,0.304) 1(25.103,2.564) 1(25.103,2.564) 1(25.248,0.304) 1(25.248,0.304) 1(25.248,2.564) 1(25.248,2.564) 1(25.603,0.304) 1(25.603,0.304) 1(25.603,2.564) 1(25.603,2.564) 1(25.748,0.304) 1(25.748,0.304) 1(25.748,2.564) 1(25.748,2.564) 1(26.103,0.304) 1(26.103,0.304) 1(26.103,2.564) 1(26.103,2.564) 1(26.248,0.304) 1(26.248,0.304) 1(26.248,2.564) 1(26.248,2.564) 1(26.603,0.304) 1(26.603,0.304) 1(26.603,2.564) 1(26.603,2.564) 1(26.748,0.304) 1(26.748,0.304) 1(26.748,2.564) 1(26.748,2.564) 1(27.103,0.304) 1(27.103,0.304) 1(27.103,2.564) 1(27.103,2.564) 1(27.248,0.304) 1(27.248,0.304) 1(27.248,2.564) 1(27.248,2.564) 1(27.603,0.304) 1(27.603,0.304) 1(27.603,2.564) 1(27.603,2.564) 1(27.748,0.304) 1(27.748,0.304) 1(27.748,2.564) 1(27.748,2.564) 1(28.103,0.304) 1(28.103,0.304) 1(28.103,2.564) 1(28.103,2.564) 1(28.248,0.304) 1(28.248,0.304) 1(28.248,2.564) 1(28.248,2.564) 1(28.603,0.304) 1(28.603,0.304) 1(28.603,2.564) 1(28.603,2.564) 1(28.748,0.304) 1(28.748,0.304) 1(28.748,2.564) 1(28.748,2.564) 1(29.103,0.304) 1(29.103,0.304) 1(29.103,2.564) 1(29.103,2.564) 1(29.248,0.304) 1(29.248,0.304) 1(29.248,2.564) 1(29.248,2.564) 1(29.603,0.304) 1(29.603,0.304) 1(29.603,2.564) 1(29.603,2.564) 1(29.748,0.304) 1(29.748,0.304) 1(29.748,2.564) 1(29.748,2.564) 1(30.103,0.304) 1(30.103,0.304) 1(30.103,2.564) 1(30.103,2.564) 1(30.248,0.304) 1(30.248,0.304) 1(30.248,2.564) 1(30.248,2.564) 1(30.603,0.304) 1(30.603,0.304) 1(30.603,2.564) 1(30.603,2.564) 1(30.748,0.304) 1(30.748,0.304) 1(30.748,2.564) 1(30.748,2.564) 1(31.103,0.304) 1(31.103,0.304) 1(31.103,2.564) 1(31.103,2.564) 1(31.248,0.304) 1(31.248,0.304) 1(31.248,2.564) 1(31.248,2.564) 1(31.603,0.304) 1(31.603,0.304) 1(31.603,2.564) 1(31.603,2.564) 1(31.748,0.304) 1(31.748,0.304) 1(31.748,2.564) 1(31.748,2.564) 1(32.103,0.304) 1(32.103,0.304) 1(32.103,2.564) 1(32.103,2.564) 1(32.248,0.304) 1(32.248,0.304) 1(32.248,2.564) 1(32.248,2.564) 1(32.603,0.304) 1(32.603,0.304) 1(32.603,2.564) 1(32.603,2.564) 1(32.748,0.304) 1(32.748,0.304) 1(32.748,2.564) 1(32.748,2.564) 1(33.103,0.304) 1(33.103,0.304) 1(33.103,2.564) 1(33.103,2.564) 1(33.248,0.304) 1(33.248,0.304) 1(33.248,2.564) 1(33.248,2.564) 1(33.603,0.304) 1(33.603,0.304) 1(33.603,2.564) 1(33.603,2.564) 1(33.748,0.304) 1(33.748,0.304) 1(33.748,2.564) 1(33.748,2.564) 1(34.103,0.304) 1(34.103,0.304) 1(34.103,2.564) 1(34.103,2.564) 1(34.248,0.304) 1(34.248,0.304) 1(34.248,2.564) 1(34.248,2.564) 1(34.603,0.304) 1(34.603,0.304) 1(34.603,2.564) 1(34.603,2.564) 1(34.748,0.304) 1(34.748,0.304) 1(34.748,2.564) 1(34.748,2.564) 1(35.103,0.304) 1(35.103,0.304) 1(35.103,2.564) 1(35.103,2.564) 1(35.248,0.304) 1(35.248,0.304) 1(35.248,2.564) 1(35.248,2.564) 1(35.603,0.304) 1(35.603,0.304) 1(35.603,2.564) 1(35.603,2.564) 1(35.748,0.304) 1(35.748,0.304) 1(35.748,2.564) 1(35.748,2.564) 1(36.103,0.304) 1(36.103,0.304) 1(36.103,2.564) 1(36.103,2.564) 1(36.248,0.304) 1(36.248,0.304) 1(36.248,2.564) 1(36.248,2.564) 1(36.603,0.304) 1(36.603,0.304) 1(36.603,2.564) 1(36.603,2.564) 1(36.748,0.304) 1(36.748,0.304) 1(36.748,2.564) 1(36.748,2.564) 1(37.103,0.304) 1(37.103,0.304) 1(37.103,2.564) 1(37.103,2.564) 1(39.248,0.304) 1(39.248,0.304) 1(39.248,2.564) 1(39.248,2.564) 1(39.603,0.304) 1(39.603,0.304) 1(39.603,2.564) 1(39.603,2.564) 1(39.748,0.304) 1(39.748,0.304) 1(39.748,2.564) 1(39.748,2.564) 1(40.103,0.304) 1(40.103,0.304) 1(40.103,2.564) 1(40.103,2.564) 1(40.248,0.304) 1(40.248,0.304) 1(40.248,2.564) 1(40.248,2.564) 1(40.603,0.304) 1(40.603,0.304) 1(40.603,2.564) 1(40.603,2.564) 1(40.748,0.304) 1(40.748,0.304) 1(40.748,2.564) 1(40.748,2.564) 1(41.103,0.304) 1(41.103,0.304) 1(41.103,2.564) 1(41.103,2.564) 1(41.248,0.304) 1(41.248,0.304) 1(41.248,2.564) 1(41.248,2.564) 1(41.603,0.304) 1(41.603,0.304) 1(41.603,2.564) 1(41.603,2.564) 1(41.748,0.304) 1(41.748,0.304) 1(41.748,2.564) 1(41.748,2.564) 1(42.103,0.304) 1(42.103,0.304) 1(42.103,2.564) 1(42.103,2.564) 1(42.248,0.304) 1(42.248,0.304) 1(42.248,2.564) 1(42.248,2.564) 1(42.603,0.304) 1(42.603,0.304) 1(42.603,2.564) 1(42.603,2.564) 1(42.748,0.304) 1(42.748,0.304) 1(42.748,2.564) 1(42.748,2.564) 1(43.103,0.304) 1(43.103,0.304) 1(43.103,2.564) 1(43.103,2.564) 1(43.248,0.304) 1(43.248,0.304) 1(43.248,2.564) 1(43.248,2.564) 1(43.603,0.304) 1(43.603,0.304) 1(43.603,2.564) 1(43.603,2.564) 1(43.748,0.304) 1(43.748,0.304) 1(43.748,2.564) 1(43.748,2.564) 1(44.103,0.304) 1(44.103,0.304) 1(44.103,2.564) 1(44.103,2.564) 1(44.248,0.304) 1(44.248,0.304) 1(44.248,2.564) 1(44.248,2.564) 1(44.603,0.304) 1(44.603,0.304) 1(44.603,2.564) 1(44.603,2.564) 1(44.748,0.304) 1(44.748,0.304) 1(44.748,2.564) 1(44.748,2.564) 1(45.103,0.304) 1(45.103,0.304) 1(45.103,2.564) 1(45.103,2.564) 1(45.248,0.304) 1(45.248,0.304) 1(45.248,2.564) 1(45.248,2.564) 1(45.603,0.304) 1(45.603,0.304) 1(45.603,2.564) 1(45.603,2.564) 1(45.748,0.304) 1(45.748,0.304) 1(45.748,2.564) 1(45.748,2.564) 1(46.103,0.304) 1(46.103,0.304) 1(46.103,2.564) 1(46.103,2.564) 1(46.248,0.304) 1(46.248,0.304) 1(46.248,2.564) 1(46.248,2.564) 1(46.603,0.304) 1(46.603,0.304) 1(46.603,2.564) 1(46.603,2.564) 1(46.748,0.304) 1(46.748,0.304) 1(46.748,2.564) 1(46.748,2.564) 1(47.103,0.304) 1(47.103,0.304) 1(47.103,2.564) 1(47.103,2.564) 1(47.248,0.304) 1(47.248,0.304) 1(47.248,2.564) 1(47.248,2.564) 1(47.603,0.304) 1(47.603,0.304) 1(47.603,2.564) 1(47.603,2.564) 1(47.748,0.304) 1(47.748,0.304) 1(47.748,2.564) 1(47.748,2.564) 1(48.103,0.304) 1(48.103,0.304) 1(48.103,2.564) 1(48.103,2.564) 1(48.248,0.304) 1(48.248,0.304) 1(48.248,2.564) 1(48.248,2.564) 1(48.603,0.304) 1(48.603,0.304) 1(48.603,2.564) 1(48.603,2.564) 1(48.748,0.304) 1(48.748,0.304) 1(48.748,2.564) 1(48.748,2.564) 1(49.103,0.304) 1(49.103,0.304) 1(49.103,2.564) 1(49.103,2.564) 1(49.248,0.304) 1(49.248,0.304) 1(49.248,2.564) 1(49.248,2.564) 1(49.603,0.304) 1(49.603,0.304) 1(49.603,2.564) 1(49.603,2.564) 1(49.748,0.304) 1(49.748,0.304) 1(49.748,2.564) 1(49.748,2.564) 1(50.103,0.304) 1(50.103,0.304) 1(50.103,2.564) 1(50.103,2.564) 1(50.248,0.304) 1(50.248,0.304) 1(50.248,2.564) 1(50.248,2.564) 1(50.603,0.304) 1(50.603,0.304) 1(50.603,2.564) 1(50.603,2.564) 1(50.748,0.304) 1(50.748,0.304) 1(50.748,2.564) 1(50.748,2.564) 1(51.103,0.304) 1(51.103,0.304) 1(51.103,2.564) 1(51.103,2.564) 1(51.248,0.304) 1(51.248,0.304) 1(51.248,2.564) 1(51.248,2.564) 1(51.603,0.304) 1(51.603,0.304) 1(51.603,2.564) 1(51.603,2.564) 1(51.748,0.304) 1(51.748,0.304) 1(51.748,2.564) 1(51.748,2.564) 1(52.103,0.304) 1(52.103,0.304) 1(52.103,2.564) 1(52.103,2.564) 1(52.248,0.304) 1(52.248,0.304) 1(52.248,2.564) 1(52.248,2.564) 1(52.603,0.304) 1(52.603,0.304) 1(52.603,2.564) 1(52.603,2.564) 1(52.748,0.304) 1(52.748,0.304) 1(52.748,2.564) 1(52.748,2.564) 1(53.103,0.304) 1(53.103,0.304) 1(53.103,2.564) 1(53.103,2.564) 1(53.248,0.304) 1(53.248,0.304) 1(53.248,2.564) 1(53.248,2.564) 1(53.603,0.304) 1(53.603,0.304) 1(53.603,2.564) 1(53.603,2.564) 1(53.748,0.304) 1(53.748,0.304) 1(53.748,2.564) 1(53.748,2.564) 1(54.103,0.304) 1(54.103,0.304) 1(54.103,2.564) 1(54.103,2.564) 1(54.248,0.304) 1(54.248,0.304) 1(54.248,2.564) 1(54.248,2.564) 1(54.603,0.304) 1(54.603,0.304) 1(54.603,2.564) 1(54.603,2.564) 1(54.748,0.304) 1(54.748,0.304) 1(54.748,2.564) 1(54.748,2.564) 1(55.103,0.304) 1(55.103,0.304) 1(55.103,2.564) 1(55.103,2.564) 1(55.248,0.304) 1(55.248,0.304) 1(55.248,2.564) 1(55.248,2.564) 1(55.603,0.304) 1(55.603,0.304) 1(55.603,2.564) 1(55.603,2.564) 1(55.748,0.304) 1(55.748,0.304) 1(55.748,2.564) 1(55.748,2.564) 1(56.103,0.304) 1(56.103,0.304) 1(56.103,2.564) 1(56.103,2.564) 1(56.248,0.304) 1(56.248,0.304) 1(56.248,2.564) 1(56.248,2.564) 1(56.603,0.304) 1(56.603,0.304) 1(56.603,2.564) 1(56.603,2.564) 1(56.748,0.304) 1(56.748,0.304) 1(56.748,2.564) 1(56.748,2.564) 1(57.103,0.304) 1(57.103,0.304) 1(57.103,2.564) 1(57.103,2.564) 1(57.248,0.304) 1(57.248,0.304) 1(57.248,2.564) 1(57.248,2.564) 1(57.603,0.304) 1(57.603,0.304) 1(57.603,2.564) 1(57.603,2.564) 1(57.748,0.304) 1(57.748,0.304) 1(57.748,2.564) 1(57.748,2.564) 1(58.103,0.304) 1(58.103,0.304) 1(58.103,2.564) 1(58.103,2.564) 1(58.248,0.304) 1(58.248,0.304) 1(58.248,2.564) 1(58.248,2.564) 1(58.603,0.304) 1(58.603,0.304) 1(58.603,2.564) 1(58.603,2.564) 1(58.748,0.304) 1(58.748,0.304) 1(58.748,2.564) 1(58.748,2.564) 1(59.103,0.304) 1(59.103,0.304) 1(59.103,2.564) 1(59.103,2.564) 1(59.248,0.304) 1(59.248,0.304) 1(59.248,2.564) 1(59.248,2.564) 1(59.603,0.304) 1(59.603,0.304) 1(59.603,2.564) 1(59.603,2.564) 1(59.748,0.304) 1(59.748,0.304) 1(59.748,2.564) 1(59.748,2.564) 1(60.103,0.304) 1(60.103,0.304) 1(60.103,2.564) 1(60.103,2.564) 1(60.248,0.304) 1(60.248,0.304) 1(60.248,2.564) 1(60.248,2.564) 1(60.603,0.304) 1(60.603,0.304) 1(60.603,2.564) 1(60.603,2.564) 1(60.748,0.304) 1(60.748,0.304) 1(60.748,2.564) 1(60.748,2.564) 1(61.103,0.304) 1(61.103,0.304) 1(61.103,2.564) 1(61.103,2.564) 1(61.248,0.304) 1(61.248,0.304) 1(61.248,2.564) 1(61.248,2.564) 1(61.6,44.995) 1(61.603,0.304) 1(61.603,0.304) 1(61.603,2.564) 1(61.603,2.564) 1(61.607,6.192) 1(61.748,0.304) 1(61.748,0.304) 1(61.748,2.564) 1(61.748,2.564) 1(62.103,0.304) 1(62.103,0.304) 1(62.103,2.564) 1(62.103,2.564) 1(62.248,0.304) 1(62.248,0.304) 1(62.248,2.564) 1(62.248,2.564) 1(62.603,0.304) 1(62.603,0.304) 1(62.603,2.564) 1(62.603,2.564) 1(62.748,0.304) 1(62.748,0.304) 1(62.748,2.564) 1(62.748,2.564) 1(63.103,0.304) 1(63.103,0.304) 1(63.103,2.564) 1(63.103,2.564) 1(63.248,0.304) 1(63.248,0.304) 1(63.248,2.564) 1(63.248,2.564) 1(63.603,0.304) 1(63.603,0.304) 1(63.603,2.564) 1(63.603,2.564) 1(63.748,0.304) 1(63.748,0.304) 1(63.748,2.564) 1(63.748,2.564) 1(64.103,0.304) 1(64.103,0.304) 1(64.103,2.564) 1(64.103,2.564) 1(64.248,0.304) 1(64.248,0.304) 1(64.248,2.564) 1(64.248,2.564) 1(64.603,0.304) 1(64.603,0.304) 1(64.603,2.564) 1(64.603,2.564) 1(64.748,0.304) 1(64.748,0.304) 1(64.748,2.564) 1(64.748,2.564) 1(65.101,47.504) 1(65.103,0.304) 1(65.103,0.304) 1(65.103,2.564) 1(65.103,2.564) 1(65.248,0.304) 1(65.248,0.304) 1(65.248,2.564) 1(65.248,2.564) 1(65.6,44.995) 1(65.603,0.304) 1(65.603,0.304) 1(65.603,2.564) 1(65.603,2.564) 1(65.607,6.192) 1(65.748,0.304) 1(65.748,0.304) 1(65.748,2.564) 1(65.748,2.564) 1(66.066,9.453) 1(66.103,0.304) 1(66.103,0.304) 1(66.103,2.564) 1(66.103,2.564) 1(66.218,44.048) 1(66.248,0.304) 1(66.248,0.304) 1(66.248,2.564) 1(66.248,2.564) 1(66.603,0.304) 1(66.603,0.304) 1(66.603,2.564) 1(66.603,2.564) 1(66.701,6.004) 1(66.748,0.304) 1(66.748,0.304) 1(66.748,2.564) 1(66.748,2.564) 1(67.103,0.304) 1(67.103,0.304) 1(67.103,2.564) 1(67.103,2.564) 1(67.248,0.304) 1(67.248,0.304) 1(67.248,2.564) 1(67.248,2.564) 1(67.336,9.453) 1(67.488,44.048) 1(67.603,0.304) 1(67.603,0.304) 1(67.603,2.564) 1(67.603,2.564) 1(67.748,0.304) 1(67.748,0.304) 1(67.748,2.564) 1(67.748,2.564) 1(68.103,0.304) 1(68.103,0.304) 1(68.103,2.564) 1(68.103,2.564) 1(68.501,6.004) 1(69.101,47.504)
  round 1.283 on Mech5: 1(1.728,9.402) 1(2.845,43.895) 1(66.701,9.453) 1(66.853,44.048)
  round 1.813 on Mech4: 1(2.001,6.004) 1(67.601,6.004)
  round 1.813 on Mech5: 1(2.001,6.004) 1(67.601,6.004)
  round 1.283 on Mech4: 1(2.083,9.148) 1(3.099,42.702) 1(66.853,44.022) 1(67.285,10.596)
  round 4.013 on Mech4: 1(2.486,47.504) 1(6,6.199) 1(6,45.005) 1(63.6,44.995) 1(67.101,47.504)
  round 4.013 on Mech5: 1(2.486,47.504) 1(6,6.199) 1(6,45.005) 1(63.6,44.995) 1(63.607,6.192) 1(67.101,47.504)
  round 3 hole 2.2: 1(2.525,47.5) 1(6,45.025) 1(6.025,6.2) 1(63.6,45) 1(67.125,47.5)
  round 0.013 on Mech7: 1(4.014,4.297) 1(4.014,4.297) 1(4.014,37.571) 1(4.014,37.571) 1(4.039,38.993) 1(4.039,38.993) 1(4.141,4.17) 1(4.141,4.17) 1(5.004,9.174) 1(5.004,9.174) 1(5.004,36.987) 1(5.004,36.987) 1(5.03,38.739) 1(5.03,38.739) 1(5.03,41.965) 1(5.03,41.965) 1(5.97,4.17) 1(5.97,4.17) 1(6.02,8.132) 1(6.02,8.132) 1(6.02,42.981) 1(6.02,42.981) 1(6.02,46.969) 1(6.02,46.969) 1(21.057,48.95) 1(21.057,48.95) 1(21.057,49.458) 1(21.057,49.458) 1(25.426,48.975) 1(25.426,48.975) 1(25.426,49.433) 1(25.426,49.433) 1(44.095,48.975) 1(44.095,48.975) 1(44.095,49.433) 1(44.095,49.433) 1(48.565,48.975) 1(48.565,48.975) 1(48.565,49.483) 1(48.565,49.483) 1(59.077,42.881) 1(59.077,42.881) 1(63.577,8.158) 1(63.577,8.158) 1(63.602,46.994) 1(63.602,46.994) 1(63.602,48.975) 1(63.602,48.975) 1(63.628,4.195) 1(63.628,4.195) 1(64.593,9.199) 1(64.593,9.185) 1(64.593,41.99) 1(64.593,41.99) 1(65.456,4.195) 1(65.456,4.195) 1(65.583,4.322) 1(65.583,4.322) 1(65.583,49.483) 1(65.583,49.483)
  round 0.013 on Mech6: 1(4.065,21.493) 1(4.065,21.493) 1(4.065,29.748) 1(4.065,29.748) 1(4.09,37.012) 1(4.09,37.012) 1(4.09,43.641) 1(4.09,43.641) 1(4.115,7.65) 1(4.115,7.65) 1(4.115,14.279) 1(4.115,14.279) 1(4.928,21.493) 1(4.928,21.493) 1(4.928,29.748) 1(4.928,29.748) 1(4.954,37.012) 1(4.954,37.012) 1(4.954,42.879) 1(4.954,42.879) 1(4.979,8.412) 1(4.979,8.412) 1(4.979,14.279) 1(4.979,14.279) 1(9.322,48.62) 1(9.322,48.62) 1(9.322,49.458) 1(9.322,49.458) 1(16.536,48.975) 1(16.536,48.975) 1(16.536,49.483) 1(16.536,49.483) 1(21.083,48.975) 1(21.083,48.975) 1(21.083,49.483) 1(21.083,49.483) 1(25.401,48.975) 1(25.401,48.975) 1(25.401,49.433) 1(25.401,49.433) 1(31.192,48.975) 1(31.192,48.975) 1(31.192,49.433) 1(31.192,49.433) 1(38.304,48.975) 1(38.304,48.975) 1(38.304,49.433) 1(38.304,49.433) 1(44.095,48.975) 1(44.095,48.975) 1(44.095,49.433) 1(44.095,49.433) 1(48.565,48.975) 1(48.565,48.975) 1(48.565,49.483) 1(48.565,49.483) 1(53.112,48.975) 1(53.112,48.975) 1(53.112,49.483) 1(53.112,49.483) 1(60.275,48.594) 1(60.275,48.594) 1(60.275,49.433) 1(60.275,49.433) 1(64.618,36.91) 1(64.618,36.91) 1(64.618,42.778) 1(64.618,42.778) 1(64.644,48.594) 1(64.644,48.594) 1(64.669,8.361) 1(64.669,8.361) 1(64.669,14.228) 1(64.669,14.228) 1(64.669,21.467) 1(64.669,21.467) 1(64.669,29.722) 1(64.669,29.722) 1(65.279,49.433) 1(65.279,49.433) 1(65.482,36.91) 1(65.482,36.91) 1(65.482,43.54) 1(65.482,43.54) 1(65.533,7.599) 1(65.533,7.599) 1(65.533,14.228) 1(65.533,14.228) 1(65.533,21.467) 1(65.533,21.467) 1(65.533,29.722) 1(65.533,29.722)